# Altium PCB Narwhal_main_FIX.PcbDoc (part 2 of 2)
Units mm, origin at the board's own origin, x right, y up, seen from the top; angles counter-clockwise.
Board outline 83 x 16.93 mm, 4 copper layers (Top Layer, Layer 1, Layer 2, Bottom Layer), stack 1.58 mm thick; 96 components, 73 nets, 381 pads, 194 vias.
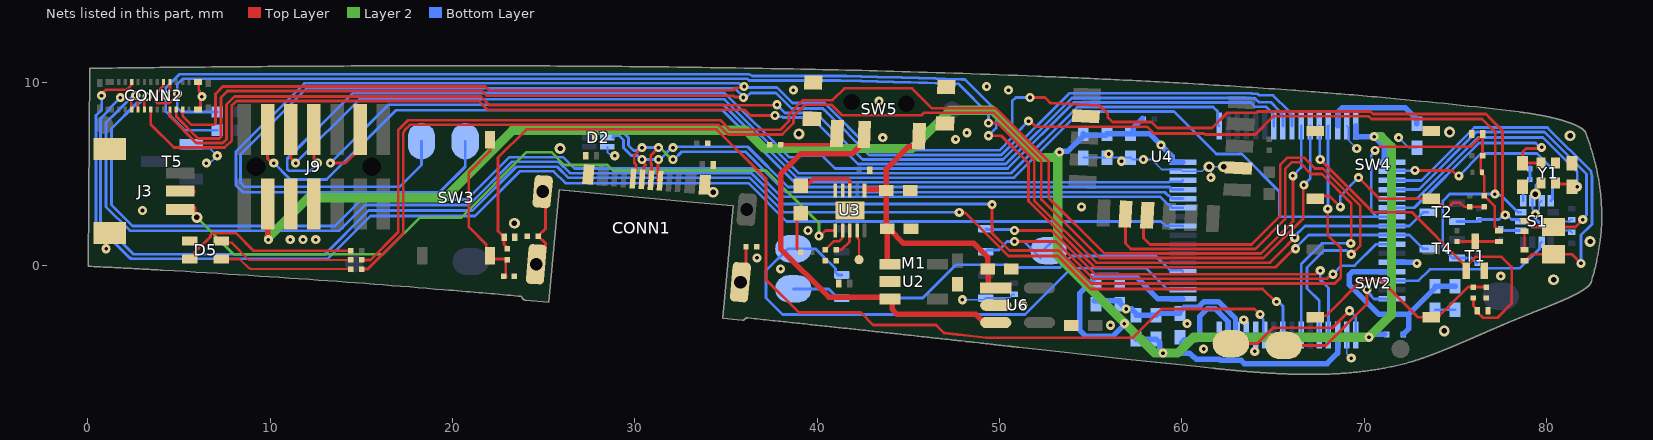
[diagram p4: the nets of this part, all layers, seen from the top]

## Via types
v1: diameter 0.5, hole 0.2, Top Layer to Bottom Layer, 125 vias
v2: diameter 0.5, hole 0.254, Top Layer to Bottom Layer, 42 vias
v3: diameter 0.6, hole 0.3, Top Layer to Bottom Layer, 27 vias

## Nets (pads, with @x,y where several pads share a name; then routed paths per layer and width w, separated by ;. In a path a pad name is that pad's centre, name@x,y a point inside that pad or via, vN(x,y) a via of type N, cw(c..) or ccw(c..) an arc to the next point about the centre after c; other vN are vias at no path point) (continued)
GND: C1.1 C2.1 C3.1 C4.1 C5.2 C6.1 C14.1 C15.1 C16.1 C17.1 C18.1 C19.1 C20.1 C21.1 C22.1 C23.1 C24.1 C26.1 C27.1 C28.1 C29.1 C30.1 C31.1 C32.1 C33.1 C34.1 C36.1 C37.1 C40.1 C41.1 CONN1.A1 CONN1.A12 CONN2.P1_1 CONN2.P1_2 D2.3 D5.1 J3.2 J3.MP1 J3.MP2 J9.5 J9.7 M1.4 R1.1 R2.1 R7.1 R14.1 R16.1 R17.1 R18.1 R19.1 R21.1 R26.1 S1.2 S1.3 S1.6 S1.7 SW4.1 SW4.2 SW5.MP1 SW5.MP2 SW5.MP3 SW5.MP4 T1.2 T5.1 U1.12 U1.18 U1.28 U1.29 U1.30 U1.32 U1.47 U1.63 U2.2 U3.4 U3.5 U3.11 U4.2 U4.13 U6.2 Y1.2 Y1.4 | length 46.8
  Top Layer w0.1: C5.2@45.1,4.1 C5.2@45.2,4.1 ; SW5.MP3@47.083,9.772 SW5.MP3@47.111,9.8 ; C31.1@78.8,0.85 C32.1@78.8,1.85
  Top Layer w0.15: CONN2.P1_2@6.09,10.042 6.09,9.611 6.118,9.582 6.118,9.473 6.251,9.34 v1(6.251,9.245) 6.185,9.179 6.185,8.68 CONN2.P1_1@6.138,8.633
  Top Layer w0.5: J3.2@4.561,4.046 J3.2@5.661,4.046
  Bottom Layer w0.1: T5.1@5.257,6.383 6.717,6.383 v1(7.1,6) 6.777,5.677 6.577,5.677 v1(6.5,5.6) ; D2.3@28.5,6.5 28.5,6.2 28.623,6.077 28.823,6.077 v1(28.9,6) ; v1(47.967,-1.899) 49.151,-1.899 M1.4@49.245,-1.805 50.535,-1.805 50.74,-1.6 C37.1@50.8,-1.6 ; C14.1@54.6,5.9 C22.1@55.9,5.9 56.7,5.9 C21.1@57.2,5.9 57.3,5.8 v1(57.9,5.8) 58.35,5.8 58.9,5.25 59.962,5.25 U1.47@60.062,5.15 61.115,5.15 61.365,5.4 v3(61.5,5.4) ; v1(61.6,4.8) 61.6,5.17 61.5,5.269 v3(61.5,5.4) ; v3(62.3,5.4) v3(61.5,5.4) ; U1.30@63.05,-3.838 U1.29@63.55,-3.838 U1.28@64.05,-3.838 ; U1.18@69.05,-3.838 69.05,-4.85 v1(69.3,-5.1) ; U1.63@69.05,7.638 69.15,7.538 69.15,6.85 v1(69.6,6.4) ; v1(71.9,7) 72.45,6.45 C15.1@72.9,6.45 ; v1@72.85,0.15 v1(72.9,0.1) ; R21.1@79.7,4.7 79.4,4.4 v3(79.4,3.9) 79.241,3.741 S1.2@79.241,3.53 79.241,3.063 79.4,2.903 v1@79.4,2.853 ; S1.3@79.741,3.53 79.613,3.402 79.613,3.066 v1@79.4,2.853 ; C1.1@81.4,1.8 81.3,1.9 S1.7@80.38,1.9 80.252,2.028 79.872,2.028 79.4,2.5 v1@79.4,2.583 ; C36.1@81.4,2.5 81.34,2.5 81.24,2.4 S1.6@80.38,2.4 79.583,2.4 v1@79.4,2.583 ; v1@79.4,2.583 v1(79.4,2.8) v1@79.4,2.853
  Bottom Layer w0.15: C17.1@73.9,-2.45 C18.1@75,-2.45
  Bottom Layer w0.3: C23.1@55.2,-1.95 56.6,-1.95 56.6,-2.05 v1(56.95,-2.4) 57.25,-2.4 57.5,-2.65 C19.1@57.5,-2.75 C20.1@58.6,-2.75 58.7,-2.65 C16.1@59.9,-2.65 59.9,-2.55 60.15,-2.3 60.934,-2.3 61.234,-2 62.019,-2 62.95,-2.931 62.95,-4.679 62.804,-4.826 62.296,-4.826 62.15,-4.679 62.15,-4.526 62.05,-4.426 U1.32@62.05,-3.838 ; U1.12@71.538,0.15 v1@72.85,0.15
  other v1: 64.008,-4.725 61.2,-4.6 56.096,-3.296 60.296,-3.204 63.4,-3 51.299,-2.199 77.5,-0.6 38,-0.2 36.7,0.4 1,0.9 11.1,1.4 11.8,1.4 12.5,1.4 39.5,1.9 3,3 54.5,3.2 56.7,5.7 56,6.1 47.6,6.9 43.6,7 48.213,7.266 43.4,9 38.7,9.6 50.5,9.6 49.3,9.8
  other v3: 74.4,-3.6 80.4,-0.8 82.4,1.3 23.4,2.3 34.3,4 25.9,6.4 81.3,7.1 39,7.2 74.7,7.3
I2C3_SCL_1V8: CONN2.3 J6.1 R3.1 S1.13 T2.2 | length 134.9
  Top Layer w0.15: CONN2.3@5.2,8.6 5.2,8.188 5.688,7.7 6.912,7.7 7,7.788 7,9.4 7.4,9.8 21.8,9.8 22,9.6 35.4,9.6 35.533,9.733 35.933,9.733 v1(36,9.8) ; v1(51.676,9.2) 52.492,9.2 52.751,8.941 52.792,8.9 52.849,8.897 55.481,8.759 55.522,8.718 55.949,8.292 55.949,8.101 56.2,7.85 58.35,7.85 58.68,7.52 61.656,7.52 62.499,8.362 64.108,8.362 64.17,8.425 70.36,8.425 70.493,8.292 76.683,8.292 76.971,8.003 77.6,7.374 77.6,2.994 77.749,2.844 v1(77.749,2.749)
  Bottom Layer w0.15: J6.1@20.7,6.8 20.7,5.4 19.3,4 8.5,4 8.125,4.375 8.125,6.225 11.875,9.975 35.73,9.975 35.905,9.8 v1(36,9.8) 36.05,9.75 37.804,9.75 38.655,8.9 40.4,8.9 43,6.3 50,6.3 50.7,7 50.7,9 50.9,9.2 v1(51.676,9.2) ; T2.2@75.1,2.4 76.2,2.4 R3.1@76.3,2.5 77.405,2.5 77.655,2.749 v1(77.749,2.749) 77.844,2.749 78.091,2.503 78.499,2.503 S1.13@78.602,2.4
I2C3_SCL_3V3: CONN2.10 R8.1 T2.3 U1.8 | length 81.9
  Top Layer w0.15: CONN2.10@4.151,10.042 4.136,10.027 4.136,9.827 3.731,9.421 3.731,9.297 3.732,9.296 3.732,8.973 3.82,8.885 4.454,8.885 4.703,9.134 4.703,9.144 4.91,9.352 v1(4.91,9.407) ; v1(49.4,7.8) 49.893,7.8 51.908,5.784 51.908,3.559 55.329,0.139 64.839,0.139 65.801,1.101 65.801,1.122 66.178,1.499 v1(66.201,1.499)
  Bottom Layer w0.15: v1@4.9,9.41 4.9,9.911 5.214,10.225 36.176,10.225 36.272,10.129 41.26,10.129 41.264,10.129 41.566,10.122 41.988,10.112 42.423,10.101 42.859,10.09 43.294,10.078 43.743,10.066 44.193,10.054 44.642,10.041 45.106,10.028 45.569,10.014 46.033,10 46.51,9.985 46.987,9.97 47.465,9.955 47.755,9.945 47.797,9.903 49.4,8.3 v1(49.4,7.8) ; v1(4.91,9.407) 4.9,9.397 4.9,8.634 5.134,8.4 R8.1@7.103,8.4 ; v1(66.201,1.499) 66.201,1.594 66.756,2.15 U1.8@71.538,2.15 72.501,2.15 T2.3@73.125,2.774 ; T2.3@73.125,2.775 73.25,2.9 T2.3@73.5,2.9
I2C3_SDA_1V8: CONN2.5 J8.1 R10.1 S1.14 T4.2 | length 135
  Top Layer w0.15: CONN2.5@4.851,8.542 4.85,8.54 4.85,8.15 6.05,6.95 7.212,6.95 7.3,7.038 7.3,9.2 7.65,9.55 21.615,9.55 21.865,9.3 35.408,9.3 35.483,9.225 35.934,9.225 v1(35.958,9.201) ; v1(51.6,7.9) 51.672,7.9 51.972,7.6 58.097,7.6 58.472,7.225 61.222,7.225 61.283,7.164 64.034,7.164 65.045,8.175 70.256,8.175 70.406,8.025 76.475,8.025 77.2,7.3 77.2,3.925 v1(77.175,3.9)
  Bottom Layer w0.15: J8.1@18.3,6.8 18.3,5.5 17.1,4.3 8.6,4.3 8.375,4.525 8.375,6.075 12,9.7 35.499,9.7 35.958,9.241 v1(35.958,9.201) ; v1@35.999,9.2 36.095,9.2 36.345,9.45 37.751,9.45 38.601,8.6 40.276,8.6 40.308,8.6 40.563,8.346 42.858,6.05 50.104,6.05 50.95,6.896 50.95,7.25 v1(51.6,7.9) ; R10.1@76.2,0.1 75.9,0.4 T4.2@75.1,0.4 74.85,0.4 74.325,0.925 74.325,3.522 74.703,3.9 v1(77.175,3.9) 77.2,3.9 77.267,3.833 77.529,3.833 78.462,2.9 S1.14@78.602,2.9
I2C3_SDA_3V3: CONN2.8 R9.1 T4.3 U1.9 | length 82.8
  Top Layer w0.15: v1(4.278,9.31) 4.278,9.351 4.5,9.573 CONN2.8@4.5,9.953 ; v1(49.4,7.1) 50.1,7.1 51.6,5.6 51.6,3.514 55.225,-0.111 65.143,-0.111 66.156,0.902 v1(66.25,0.902)
  Bottom Layer w0.15: v1@4.273,9.31 4.273,9.726 5.022,10.475 36.28,10.475 36.437,10.38 41.125,10.38 41.175,10.381 41.572,10.372 41.994,10.361 42.43,10.351 42.865,10.339 43.301,10.328 43.75,10.316 44.2,10.304 44.649,10.291 45.113,10.278 45.577,10.264 46.04,10.25 46.518,10.235 46.995,10.22 47.473,10.205 47.965,10.188 48.118,10.183 48.16,10.141 49.825,8.476 49.825,7.525 v1(49.4,7.1) ; v1(4.278,9.31) 4.278,8.422 5.3,7.4 R9.1@7.103,7.4 ; v1(66.25,0.902) 66.25,0.948 66.952,1.65 U1.9@71.538,1.65 72.501,1.65 73.125,1.025 73.25,0.9 T4.3@73.5,0.9
IMU_CS: R22.1 S1.12 | length 1.1
  Bottom Layer w0.15: R22.1@77.5,2 77.6,1.9 S1.12@78.602,1.9
IMU_IS_INT1: S1.4 U1.2 | length 11.6
  Top Layer w0.15: v1(72.8,5.2) 74.828,5.2 75.128,4.9 v1(75.2,4.9)
  Bottom Layer w0.15: U1.2@71.538,5.15 71.563,5.175 72.775,5.175 v1(72.8,5.2) ; v1(75.2,4.9) 76.425,6.125 79.488,6.125 80.344,5.269 80.344,3.633 S1.4@80.241,3.53
IMU_IS_INT2: S1.9 U1.14 | length 9.2
  Bottom Layer w0.15: U1.14@71.538,-0.85 72.988,-0.85 73.613,-0.225 76.422,-0.225 76.472,-0.175 78.539,-0.175 79.638,0.924 79.638,1.167 S1.9@79.741,1.27
IMU_SA0: R20.2 R21.2 S1.1 | length 2
  Bottom Layer w0.15: S1.1@78.741,3.53 78.741,4.341 R21.2@79.1,4.7 R20.2@79.1,5.4
MCU_3V3: C14.2 C19.2 C20.2 C21.2 C22.2 C23.2 C24.2 J9.3 L1.2 R23.1 U1.1 U1.19 U1.33 U1.48 U1.64 | length 126.5
  Top Layer w0.3: J9.3@9.86,3.365 9.88,3.345 9.88,1.42 v1(9.9,1.4)
  Layer 2 w0.5: v1(9.9,1.4) 9.9,1.5 12.1,3.7 19.6,3.7 23.3,7.4 36.1,7.4 37.1,6.4 45.2,6.4 47.3,8.5 49.6,8.5 52.2,5.9 53,5.9 ; v1(53.3,6.2) 53.2,6.1 53.2,0.501 56.855,-3.153 v1(56.855,-3.208) ; v1@56.882,-3.18 58.509,-4.808 58.674,-4.825 v1(58.976,-4.825) 59.775,-4.825 60.645,-3.955 v1(70.27,-3.955) 71.5,-2.725 71.5,6.5 70.95,7.05 v1(70.557,7.05)
  Bottom Layer w0.3: v1(53.3,6.2) 53.345,6.245 53.745,6.245 54.6,7.1 C14.2@54.6,7.2 ; C14.2@54.662,7.138 55.262,7.138 ; C23.2@55.2,-0.65 55.2,-0.75 54.4,-1.55 54.4,-3.546 54.754,-3.9 56.2,-3.9 56.855,-3.245 v1(56.855,-3.208) ; 55.338,7.138 55.838,7.138 C22.2@55.9,7.2 C21.2@57.2,7.2 ; C23.2@55.4,-0.55 56.5,-0.55 56.6,-0.65 57.512,-0.65 58.712,-1.85 U1.33@60.062,-1.85 ; v1@56.893,-3.207 57.35,-3.664 57.35,-3.9 C19.2@57.5,-4.05 C20.2@58.6,-4.05 58.8,-4.25 58.8,-4.65 v1(58.976,-4.825) 60.426,-4.825 60.79,-5.15 60.874,-5.15 62.055,-5.15 62.131,-5.226 63.266,-5.226 63.44,-5.4 67.976,-5.4 68.55,-4.825 U1.19@68.55,-3.838 ; R23.1@57.85,8.05 57.35,7.55 57.35,7.35 C21.2@57.2,7.2 ; U1.48@60.062,5.65 59.474,5.65 59.474,5.975 58.25,7.2 C21.2@57.2,7.2 ; U1.64@69.55,7.638 69.55,7.05 v1(70.557,7.05) 71.1,6.507 71.1,5.65 U1.1@71.538,5.65 ; v1@70.425,-3.8 L1.2@71.15,-3.8
  other v1: 58.862,6.588
MCU_BOOT: C26.2 R6.1 T1.1 U1.60 | length 20.3
  Top Layer w0.15: v1(67.6,5.8) 70.496,2.904 72.634,2.904 75.464,0.075 75.575,0.075 75.725,0.075 76.109,0.459 77.541,0.459 78.1,-0.1 78.1,-2.1 77.315,-2.885 76.525,-2.885 76.2,-2.56 C26.2@76.2,-2.5 76.2,-2.44 76,-2.24 R6.1@76,-1.8
  Bottom Layer w0.15: U1.60@67.55,7.638 67.575,7.613 67.575,5.825 v1(67.6,5.8)
MCU_BUTTON: C27.2 R12.1 U1.27 | length 57.6
  Top Layer w0.15: R12.1@23,0.9 22.925,0.975 22.925,1.05 22.829,1.146 22.829,1.599 22.754,1.674 22.694,1.674 22.5,1.868 22.5,5.899 24.051,7.45 34.494,7.45 37.2,4.744 37.2,-0.8 39,-2.6 42.4,-2.6 43.075,-3.275 46.533,-3.275 46.941,-3.683 46.978,-3.721 47.696,-3.8 48.346,-3.872 49.278,-3.975 57.325,-3.975 58.9,-2.4 63.999,-2.4 v1(64.299,-2.701)
  Bottom Layer w0.15: v1(64.299,-2.701) 64.299,-2.795 64.475,-2.971 64.475,-3.763 U1.27@64.55,-3.838
MCU_GREEN_LED: R36.2 U1.59 | length 70.3
  Top Layer w0.15: R36.2@15.026,-0.214 15.351,-0.214 17.3,1.735 17.3,7.201 17.3,7.251 17.381,7.409 17.408,7.447 17.661,7.7 34.597,7.7 35.122,7.175 38.083,7.175 38.711,7.803 38.711,8.172 39.339,8.8 40.8,8.8 41.377,8.223 45.723,8.223 45.821,8.321 45.865,8.365 49.681,8.365 52.3,5.746 52.3,3.6 55.511,0.389 64.489,0.389 66.667,2.567 66.667,4.367 v1(66.7,4.4)
  Bottom Layer w0.15: v1(66.7,4.4) 67.05,4.75 67.05,6.147 U1.59@67.05,7.638
MCU_I/O_1: CONN2.7 U1.57 | length 68.8
  Top Layer w0.15: CONN2.7@4.5,8.6 4.5,8.146 5.946,6.7 6.2,6.7 7.4,6.7 7.6,6.9 7.6,8.811 8.044,9.255 21.556,9.255 22.036,8.775 37.775,8.775 v1(37.8,8.8)
  Bottom Layer w0.15: v1(37.8,8.8) 38.25,8.35 39.95,8.35 42.5,5.8 50.207,5.8 53.832,9.425 63.812,9.425 63.84,9.423 64.096,9.406 64.152,9.402 64.192,9.363 64.239,9.315 65.008,9.315 65.875,8.448 65.875,8.388 65.963,8.3 65.975,8.3 66.05,8.226 U1.57@66.05,7.638
MCU_I/O_2: CONN2.13 U1.56 | length 69.6
  Top Layer w0.15: CONN2.13@3.45,8.542 3.45,7.718 4.718,6.45 7.504,6.45 7.898,6.844 7.898,8.756 8.148,9.005 21.453,9.005 21.933,8.525 36.021,8.525 36.337,8.21 v1(37.693,8.21)
  Bottom Layer w0.15: v1(37.693,8.21) 37.76,8.143 38.104,8.143 38.146,8.1 39.7,8.1 42.25,5.55 50.35,5.55 53.975,9.175 63.804,9.175 63.963,9.164 64.019,9.161 64.059,9.121 64.244,8.936 64.887,8.936 65.375,8.448 65.375,8.401 65.55,8.226 U1.56@65.55,7.638
MCU_I/O_3: CONN2.15 U1.43 | length 69.5
  Top Layer w0.15: CONN2.15@3.1,8.681 3.1,8.998 3.258,9.156 v1(3.258,9.251)
  Bottom Layer w0.15: v1(3.258,9.251) 3.173,9.251 2.803,8.881 2.681,8.881 1.3,7.5 1.3,3.3 2.455,2.145 13.545,2.145 15,3.6 20.8,3.6 23.125,5.925 26.074,5.925 26.699,5.3 36.5,5.3 38.05,3.75 58.827,3.75 59.252,3.325 59.312,3.325 59.4,3.237 59.4,3.225 59.474,3.15 U1.43@60.062,3.15
MCU_I/O_4: CONN2.20 U1.41 | length 72.9
  Top Layer w0.15: v1(0.751,9.304) 0.751,9.386 0.983,9.619 2.126,9.619 2.384,9.876 2.384,9.88 2.386,9.883 2.386,10.027 CONN2.20@2.401,10.042
  Bottom Layer w0.15: v1(0.751,9.304) 0.767,9.287 0.767,8.545 0.442,8.219 0.442,2.258 2.3,0.4 2.346,0.4 2.396,0.35 13.15,0.35 15.5,2.7 21.241,2.7 23.691,5.15 25.55,5.15 26.2,4.5 36.232,4.5 38.332,2.4 40.859,2.4 40.872,2.413 41.043,2.413 41.056,2.4 58.866,2.4 59.1,2.166 60.046,2.166 U1.41@60.062,2.15
MCU_LPUART1_RX: J1.1 U1.17 | length 8.9
  Top Layer w0.15: J1.1@62.75,-4.25 J1.1@62.7,-4.3 64.142,-4.3 65.008,-3.433 68.267,-3.433 v1(69.2,-2.5) v1@69.25,-2.55
  Bottom Layer w0.15: v1(69.2,-2.5) 69.55,-2.85 U1.17@69.55,-3.838
MCU_LPUART1_TX: J2.1 U1.16 | length 8
  Top Layer w0.15: J2.1@65.6,-4.4 67.901,-4.4 70.165,-2.136 v1(70.165,-1.335)
  Bottom Layer w0.15: v1(70.165,-1.335) 70.165,-1.43 70.383,-1.648 70.383,-1.683 70.55,-1.85 U1.16@71.538,-1.85
MCU_NRST: C25.2 C28.2 D1.2 J9.12 R5.1 R13.1 U1.7 | length 84.8
  Top Layer w0.15: v1(13.3,5.6) 14.13,5.6 14.94,6.41 J9.12@14.94,7.435 ; v1(70.6,6.3) 70.663,6.3 70.863,6.5 75.86,6.5 C28.2@76.5,7.14 ; R5.1@76.4,6 76.4,5.065 76.6,4.865 R13.1@76.6,3.8 77.175,3.225 77.175,2.125 77.265,2.035 77.265,1.975 77.34,1.9 C25.2@77.4,1.9 ; R5.1@76.5,6 C28.2@76.5,7.14 ; C28.2@76.5,7.2 C28.2@76.5,7.14
  Bottom Layer w0.15: v1(13.3,5.6) 16.5,8.8 34.867,8.8 38.867,4.8 50.8,4.8 54.425,8.425 59.575,8.425 61.9,6.1 63.3,6.1 65.35,4.05 65.35,2.65 70.703,2.65 ; v1(70.6,6.3) 70.6,6.237 70.4,6.037 70.4,2.953 70.703,2.65 ; U1.7@71.538,2.65 70.703,2.65
MCU_OSC32_IN: C31.2 U1.3 X1.2 | length 21.9
  Top Layer w0.15: C31.2@78.8,0.25 78.86,0.25 79.21,0.6 X1.2@80.4,0.6 81.4,0.6 v1(81.9,0.1)
  Bottom Layer w0.15: U1.3@71.538,4.65 73.151,4.65 76.051,7.55 80.05,7.55 80.1,7.5 82.444,5.156 82.448,5.136 82.464,5.06 82.48,4.985 82.495,4.91 82.5,4.884 82.5,2.247 81.9,1.647 v1(81.9,0.1)
MCU_OSC32_OUT: C32.2 U1.4 X1.1 | length 19.1
  Top Layer w0.15: C32.2@78.74,2.45 C32.2@78.8,2.45 78.86,2.45 79.21,2.1 X1.1@80.4,2.1 81.6,2.1 v1(82,2.5)
  Bottom Layer w0.15: U1.4@71.538,4.15 73.005,4.15 76.155,7.3 79.9,7.3 82.2,5 82.2,2.763 82,2.563 v1(82,2.5)
MCU_OSC_IN: C29.2 U1.5 Y1.1 | length 14.4
  Top Layer w0.15: Y1.1@80.5,4.5 80.55,4.45 81.25,4.45 C29.2@81.4,4.3 v1(81.7,4.3)
  Bottom Layer w0.15: U1.5@71.538,3.65 72.896,3.65 76.246,7 79.809,7 81.7,5.109 v1(81.7,4.3)
MCU_OSC_OUT: C30.2 U1.6 Y1.3 | length 12.5
  Top Layer w0.15: Y1.3@79.7,5.6 C30.2@78.7,5.6 78.7,6.2 78.9,6.4 79.676,6.4 v1(79.742,6.466)
  Bottom Layer w0.15: U1.6@71.538,3.15 72.756,3.15 76.306,6.7 79.413,6.7 79.647,6.466 v1(79.742,6.466)
MCU_RED_LED: R37.2 U1.58 | length 70
  Top Layer w0.15: R37.2@15.026,0.286 15.497,0.286 17.027,1.816 17.027,7.419 17.558,7.95 34.701,7.95 35.226,7.425 37.98,7.425 38.461,7.906 38.461,8.276 39.235,9.05 40.85,9.05 41.5,9.7 45.2,9.7 46.285,8.615 49.785,8.615 52.7,5.7 52.7,3.7 55.761,0.639 64.339,0.639 66.1,2.4 v1(66.1,4.9)
  Bottom Layer w0.15: v1(66.1,4.9) 66.55,5.35 U1.58@66.55,7.638
MCU_SWCLK: J9.6 U1.49 | length 58.1
  Top Layer w0.15: J9.6@11.13,7.435 11.13,5.87 v1(11.4,5.6)
  Bottom Layer w0.15: v1(11.4,5.6) 14.9,9.1 34.92,9.1 38.97,5.05 50.65,5.05 54.275,8.675 61.725,8.675 61.975,8.425 61.975,7.713 U1.49@62.05,7.638
MCU_SWDIO: J9.4 U1.46 | length 55.5
  Top Layer w0.15: J9.4@9.86,7.435 9.86,5.84 10.033,5.667 10.133,5.667 v1(10.2,5.6)
  Bottom Layer w0.15: v1(10.2,5.6) 11.1,4.7 13.1,4.7 16.9,8.5 34.813,8.5 38.763,4.55 59.312,4.55 59.337,4.575 59.987,4.575 U1.46@60.062,4.65
MCU_SWO: J9.8 U1.55 | length 64.2
  Top Layer w0.15: J9.8@12.4,7.435 12.4,5.8 v1(12.6,5.6)
  Bottom Layer w0.15: v1(12.6,5.6) 12.175,5.175 11.025,5.175 10.937,5.263 10.937,5.837 14.55,9.45 34.924,9.45 38.449,5.925 39.028,5.925 39.103,6 40.287,6 40.987,5.3 50.454,5.3 54.079,8.925 63.791,8.925 64.03,8.686 64.637,8.686 64.875,8.448 64.875,8.4 65.05,8.226 U1.55@65.05,7.638
MCU_USART3_RX: U1.21 U4.8 | length 27.8
  Top Layer w0.15: U4.8@58.113,2.739 57.9,2.526 57.9,1.5 58.261,1.139 63.839,1.139 65.4,2.7 65.4,5.5 65.8,5.9 66.7,5.9 67.3,5.3 67.746,5.3 69.8,3.246 69.8,1.078 69.322,0.6 v1(69.3,0.6)
  Bottom Layer w0.15: U1.21@67.55,-3.838 67.55,-1.95 66.875,-1.275 66.875,-0.125 67.8,0.8 69.037,0.8 69.237,0.6 v1(69.3,0.6)
MCU_USART3_TX: U1.23 U4.7 | length 27.9
  Top Layer w0.15: U4.7@56.915,2.802 56.915,1.185 57.211,0.889 64.039,0.889 65.675,2.525 65.675,5.275 66.05,5.65 66.45,5.65 67.1,5 67.693,5 69.3,3.393 69.3,1.225 v1(69.275,1.2)
  Bottom Layer w0.15: U1.23@66.55,-3.838 66.55,0.05 67.7,1.2 v1(69.275,1.2)
MCU_VDD11_1: C16.2 U1.31 | length 5
  Bottom Layer w0.3: C16.2@60,-4.25 60.15,-4.1 60.824,-4.1 61,-3.924 61,-2.8 61.4,-2.4 61.853,-2.4 62.55,-3.097 U1.31@62.55,-3.838
MCU_VDD11_2: C15.2 U1.62 | length 5.7
  Bottom Layer w0.3: U1.62@68.55,7.638 68.55,8.379 68.796,8.625 72.275,8.625 72.9,8 C15.2@72.9,7.75
MCU_VDDA: C17.2 C18.2 L1.1 U1.13 | length 11.4
  Bottom Layer w0.3: U1.13@71.538,-0.35 69.376,-0.35 69.2,-0.526 69.2,-1.078 70.822,-2.7 72.45,-2.7 ; L1.1@72.145,-3.8 72.45,-3.495 72.45,-2.7 ; C18.2@75,-1.15 C17.2@73.9,-1.15 73.9,-1.25 72.45,-2.7
MDF1_CCK0: CONN2.17 U1.61 | length 90
  Top Layer w0.15: v1(2.627,9.306) 2.627,9.212 2.742,9.097 CONN2.17@2.742,8.485 ; v1(49.6,3.325) 49.6,1.754 50.554,0.8 53.254,0.8 55.054,-1 68.4,-1 68.475,-0.925 ; v1(68.008,3.089) 68.008,1.666 68.725,0.949 68.725,-0.676 68.476,-0.925
  Bottom Layer w0.15: v1(2.627,9.306) 2.533,9.306 2.412,9.186 2.376,9.186 1.609,8.418 1.599,8.418 1,7.819 1,3.2 2.305,1.895 13.795,1.895 15.2,3.3 20.9,3.3 23.275,5.675 25.825,5.675 26.45,5.05 36.389,5.05 38.082,3.356 49.569,3.356 v1(49.6,3.325) ; v1(68.008,3.089) 68.029,3.11 68.029,7.617 U1.61@68.05,7.638
MDF1_SDIO: CONN2.19 U1.25 | length 80.7
  Top Layer w0.15: v1(1.783,9.194) 1.792,9.186 2.147,9.186 2.385,8.948 2.385,8.702 2.386,8.701 CONN2.19@2.386,8.468 ; v1(47.8,2.9) 47.836,2.864 48.136,2.864 50.5,0.5 53.2,0.5 55,-1.3 64.443,-1.3 65.143,-2 v1(65.2,-2)
  Bottom Layer w0.15: v1(1.783,9.194) 1.217,8.627 1.217,8.57 0.7,8.054 0.7,2.4 2.5,0.6 13,0.6 15.4,3 21.1,3 23.5,5.4 25.746,5.4 26.346,4.8 36.285,4.8 38.185,2.9 v1(47.8,2.9) ; v1@65.25,-1.95 65.55,-2.25 U1.25@65.55,-3.838
NetC25_1: C25.1 R4.1 T1.3 | length 2.3
  Top Layer w0.15: R4.1@75.1,1.3 T1.3@76.1,1.3 C25.1@77.4,1.3
NetCONN1_MH1: CONN1.MH1 CONN1.MH2 R18.2 | length 4.6
  Top Layer w0.156: CONN1.MH2@24.601,-0.256 24.601,0.426 25.1,0.925 25.1,1.2 R18.2@24.7,1.6 25.1,2 25.1,3.579 CONN1.MH1@24.95,3.729
NetCONN1_MH3: CONN1.MH3 R19.2 | length 2.4
  Top Layer w0.156: CONN1.MH3@35.798,-1.235 36.077,-0.957 36.077,0.006 36.1,0.029 R19.2@36.1,1
NetD3_1: D3.1 U3.3 | length 3.5
  Top Layer w0.2: D3.1@39.1,4.05 39.775,4.725 41.691,4.725 41.809,4.608 41.809,4.442 41.8,4.434 U3.3@41.8,4.1
NetD3_2: D3.2 R25.2 | length 2.3
  Top Layer w0.15: R25.2@39.1,0.7 38.9,0.9 38.9,2.65 D3.2@39.1,2.85
NetD5_2: D5.2 R37.1 | length 7.5
  Top Layer w0.127: D5.2@7.331,1.331 7.42,1.242 7.872,1.242 8.827,0.286 R37.1@14.426,0.286
NetD5_3: D5.3 R36.1 | length 7.3
  Top Layer w0.127: D5.3@7.331,0.331 8.337,0.331 8.834,-0.166 8.888,-0.166 8.936,-0.214 R36.1@14.426,-0.214
NetD5_4: D5.4 R35.1 | length 10
  Top Layer w0.15: D5.4@5.581,0.331 5.674,0.331 5.849,0.506 5.849,0.719 6.037,0.906 6.078,0.906 6.731,1.559 6.731,1.654 6.833,1.756 8.131,1.756 9.101,0.786 R35.1@14.426,0.786
NetR1_2: R1.2 U3.7 | length 1.6
  Top Layer w0.15: R1.2@40.45,0.85 40.908,1.308 41.208,1.308 41.375,1.475 41.375,1.875 U3.7@41.4,1.9
NetR2_2: R2.2 U3.8 | length 1.5
  Top Layer w0.15: R2.2@41.05,0.85 41.35,0.85 41.775,1.275 41.775,1.875 U3.8@41.8,1.9
NetR6_2: R6.2 R7.2 SW2.1 SW2.2 | length 11.7
  Top Layer w0.15: SW2.2@67.319,-2.854 67.405,-2.768 67.932,-2.768 69.9,-0.8 70.9,-0.8 72.954,-2.854 SW2.1@73.681,-2.854 73.886,-2.65 74.25,-2.65 75.7,-1.2 R6.2@76,-1.2 R7.2@76.65,-1.2
NetR11_1: R11.1 R13.2 SW4.3 SW4.4 | length 11.4
  Top Layer w0.15: SW4.3@67.319,3.646 67.473,3.8 68.1,3.8 68.7,3.2 v1(68.701,3.2) ; v1(69.7,4.8) 70.854,3.646 73.878,3.646 74.295,3.229 74.688,3.229 74.883,3.425 75.276,3.425 75.501,3.2 R11.1@75.8,3.2 R13.2@76.6,3.2
  Bottom Layer w0.15: v1(68.701,3.2) 68.7,3.201 68.7,3.8 v1(69.7,4.8)
NetR12_2: R12.2 R14.2 SW3.3 SW3.4 | length 9.3
  Top Layer w0.15: SW3.3@22.054,0.5 21.85,0.704 21.85,1.15 20.9,2.1 20.9,5.1 22.054,6.254 SW3.4@22.054,6.881 ; SW3.3@22.054,0.519 22.234,0.339 22.918,0.339 22.928,0.329 22.928,-0.59 22.938,-0.6 R14.2@22.938,-0.665
NetR26_2: R26.2 SW5.3 | length 3.5
  Top Layer w0.2: R26.2@38.024,6.6 40.814,6.6 41.09,6.876 SW5.3@41.09,7.23
NTC: J3.3 U3.6 | length 41.8
  Top Layer w0.15: J3.3@5.073,3.064 5.349,3.064 J3.3@5.441,3.156 ; J3.3@5.773,3.269 5.897,3.145 5.897,2.703 v3(5.98,2.62) ; v1(40.1,1.6) 40.172,1.6 40.472,1.9 U3.6@41,1.9
  Layer 2 w0.15: v3(5.98,2.62) 8,0.6 16.2,0.6 18.2,2.6 20.472,2.6 24.072,6.2 25.428,6.2 26.128,5.5 28.5,5.5 28.8,5.2 37.2,5.2 40.1,2.3 v1(40.1,1.6)
SPI2_CS_NAND: M1.1 U1.20 | length 23.2
  Top Layer w0.15: v1(50.825,1.9) 52.861,1.9 55.261,-0.5 67.337,-0.5 67.537,-0.3 v1(67.6,-0.3)
  Bottom Layer w0.15: M1.1@49.245,2.005 49.298,1.953 50.772,1.953 v1(50.825,1.9) ; v1(67.6,-0.3) 67.6,-0.8 68.05,-1.25 U1.20@68.05,-3.838
SPI2_MISO: J7.1 M1.2 U1.10 | length 26.6
  Top Layer w0.15: v1(50.826,1.3) 53.107,1.3 55.157,-0.75 67.955,-0.75 68.205,-0.5 v1(68.3,-0.5)
  Bottom Layer w0.15: M1.2@49.245,0.735 49.349,0.839 49.965,0.839 50.426,1.3 50.776,1.3 v1@50.788,1.312 ; v1@50.8,1.3 51.35,1.3 52.225,0.425 J7.1@52.25,0.4 ; J7.1@52.425,0.825 J7.1@52.9,1.3 ; v1(68.3,-0.5) 68.775,-0.025 69.476,-0.025 70.651,1.15 U1.10@71.538,1.15
SPI2_MOSI: J4.1 M1.5 U1.36 | length 23
  Bottom Layer w0.15: J4.1@38.7,-1.3 40.64,-1.3 41.145,-1.805 M1.5@41.355,-1.805 45.795,-1.805 47.625,0.025 50.404,0.025 50.554,-0.125 53.333,-0.125 53.958,0.5 58.577,0.5 59.352,-0.275 59.987,-0.275 U1.36@60.062,-0.35
SPI2_SCK: J5.1 M1.6 U1.34 | length 31.6
  Bottom Layer w0.15: M1.6@41.355,-0.535 41.145,-0.535 41.01,-0.4 41.01,-0.19 39.92,0.9 J5.1@38.7,0.9 38.4,0.9 37.2,-0.3 37.2,-1.8 38.1,-2.7 51.4,-2.7 53.925,-0.175 58.075,-0.175 59.203,-1.303 60.015,-1.303 U1.34@60.062,-1.35
STAT1: J12.1 U3.9 | length 1.6
  Top Layer w0.127: U3.9@42.2,1.9 42.236,1.863 42.236,1.463 42.3,1.4 J12.1@42.3,0.3
SWITCH_ON: SW5.2 U2.3 U6.3 | length 23.2
  Top Layer w0.3: SW5.2@42.589,7.177 42.589,6.791 41.904,6.106 39.103,6.106 38,5.003 38,0.9 40.65,-1.75 43.475,-1.75 U2.3@43.65,-1.925 ; U2.3@44,-1.85 44.124,-1.974 44.124,-2.424 44.395,-2.695 48.714,-2.695 49.168,-3.15 U6.3@49.799,-3.15
SYS: C2.2 C5.1 C40.2 SW5.1 U2.1 U3.1 U6.1 | length 16.9
  Top Layer w0.3: U3.1@42.6,4.1 42.6,4.126 42.65,4.176 C5.1@43.6,4.176 ; C2.2@43.8,2 C5.1@43.8,4.1 43.8,5.285 45.013,6.498 45.362,6.498 45.588,6.724 SW5.1@45.588,7.073 ; 43.85,0.377 C2.2@43.85,2 43.95,2 44.75,1.2 48.6,1.2 49.35,0.45 C40.2@49.35,-0.2 49.4,-0.25 49.4,-1.092 49.558,-1.25 U6.1@49.799,-1.25
USB_OTG_N: CONN1.A7 CONN1.B7 D2.1 U1.44 | length 38.2
  Top Layer w0.156: CONN1.B7@29.936,4.485 29.936,5.158 30.063,5.285 30.063,5.532 29.972,5.623 29.972,6.022 v1(30.4,6.45) ; CONN1.A7@30.854,4.407 30.828,4.432 30.828,5.152 30.917,5.241 30.917,5.578 30.872,5.623 30.872,6.022 v1(31.3,6.45)
  Layer 2 w0.156: v1(31.3,6.45) 31.375,6.45 32.025,5.8 v1(32.1,5.8)
  Bottom Layer w0.156: D2.1@28.8,7.45 28.822,7.428 28.876,7.428 28.913,7.391 29.25,7.391 29.653,6.988 29.653,6.563 29.925,6.291 30.147,6.291 30.307,6.45 v1(30.4,6.45) ; v1@30.346,6.5 30.396,6.45 v1(31.3,6.45) ; v1(32.1,5.8) 32.154,5.8 32.573,6.219 36.081,6.219 38.297,4.003 59.07,4.003 59.251,3.822 59.302,3.822 59.474,3.65 U1.44@60.062,3.65
USB_OTG_P: CONN1.A6 CONN1.B6 D2.2 U1.45 | length 36.5
  Top Layer w0.156: CONN1.A6@30.4,4.407 30.4,5.084 30.511,5.196 30.511,5.409 30.599,5.497 30.599,5.498 30.507,5.591 30.507,5.693 v1(30.4,5.8) ; v1(31.3,5.8) 31.272,5.772 31.272,4.651 31.396,4.528 CONN1.B6@31.396,4.319
  Bottom Layer w0.156: D2.2@28.8,6.988 28.8,7.05 28.822,7.072 28.876,7.072 28.913,7.11 29.134,7.11 29.372,6.872 29.372,6.446 29.809,6.01 30.137,6.01 30.346,5.8 31.375,5.8 32.025,6.45 v1(32.1,6.45) ; v1@32.05,6.5 36.197,6.5 38.413,4.284 59.34,4.284 59.474,4.15 U1.45@60.062,4.15
pads on no net: CONN1.A8 CONN1.B8 CONN1.MH4 CONN2.2 CONN2.4 CONN2.6 CONN2.11 CONN2.12 CONN2.14 CONN2.16 CONN2.18 CONN2.21 CONN2.22 CONN2.23 CONN2.24 CONN2.P1_3 CONN2.P1_4 CONN2.P2_1 CONN2.P2_2 CONN2.P2_3 CONN2.P2_4 D2.5 D2.6 J9.1 J9.2 J9.9 J9.10 J9.11 J9.13 J9.14 J9.15 J9.16 S1.10 S1.11 SW5.MH1 SW5.MH2 U1.11 U1.15 U1.22 U1.24 U1.26 U1.35 U1.51 U1.52 U1.53 U1.54 U2.4 U4.1 U4.3 U4.4 U4.5 U4.15 U6.4
copper on no net:
  other v2: 66.977,-6.308 65.764,-6.27 68.19,-6.278 64.552,-6.215 42.129,-3.882 40.981,-3.751 39.787,-3.623 38.612,-3.488 37.431,-3.38 20.656,-1.755 19.409,-1.631 18.162,-1.568 16.916,-1.444 15.669,-1.387 83.149,0.253 -0.274,0.4 83.282,1.345 -0.274,1.428 -0.274,2.457 83.398,2.438 -0.274,3.486 83.446,3.531 -0.274,4.515 83.337,4.623 -0.274,5.543 -0.274,6.572 -0.274,7.601 -0.274,8.629 74.275,9.239 73.084,9.346 71.894,9.448 70.703,9.565 -0.274,9.658 69.513,9.691 -0.274,10.687 29.768,11.209 30.711,11.209 31.654,11.209 32.596,11.209 33.539,11.209 34.482,11.209 35.425,11.209

## Polygon pours and split planes (outlines as drawn)
GND on Top Layer "NONET_L-01_P-001" (solid, pour order 41): 0.304,6.805 7.978,6.755 8.017,0.413 5.365,0.4 4.2,0.4 0.818,0.4 0.304,0.914
GND on Top Layer "NONET_L-01_P-001" (solid, pour order 71): 37.724,10.408 55.705,10.408 56.56,9.553 56.56,-4.618 54.811,-6.368 50.303,-4.795 42.1,-3.5 42,-3.6 41.8,-3.4 36.5,-3.4 36.5,-2.9 35.1,-1.5 35.2,-1.4 35.2,7.885
BATT on Top Layer "NONET_L-01_P-001" (solid, pour order 23): 38.644,6 40.685,6 40.83,6 40.83,4.973 38.644,4.973
GND on Top Layer "NONET_L-01_P-001" (solid, pour order 25): 25.6,6.7 26.2,7.3 34.367,7.3 35.743,5.925 35.37,3.738 25.6,4.511
3V3 on Top Layer "NONET_L-01_P-001" (solid, pour order 63): 44.627,0.75 44.627,-0.576 47.72,-0.613 47.72,-0.795 48.612,-0.804 48.612,-0.625 48.612,0.712
BATT_POS on Top Layer "NONET_L-01_P-001" (solid, pour order 14): 2.144,6.877 3.778,6.877 3.778,4 3.678,3.9 2.328,3.9 2.144,4.084
GND on Top Layer "NONET_L-01_P-001" (solid, pour order 45): 78.1,3.301 82.296,3.301 82.3,3.304 82.5,3.104 82.5,-0.5 81.8,-1.2 81.8,-1.3 79.4,-1.3 79.2,-1.5 78.1,-0.4
1V8 on Top Layer "NONET_L-01_P-001" (solid, pour order 69): 51.231,-0.815 51.231,-1.377 51.208,-1.4 51.508,-1.7 52.5,-1.7 54.5,-3.7 56.6,-3.7 56.6,-1.793 56.508,-1.701 54.949,-1.701 54.063,-0.815
GND on Top Layer "NONET_L-01_P-001" (solid, pour order 44): 78.1,7.399 78.1,3.301 78.201,3.2 82.196,3.2 82.3,3.304 82.3,6.504 81.405,7.399
GND on Top Layer "tga" (solid, pour order 46): 75.867,0.455 78.3,0.981 78.3,-0.1 82,-1.4 77.077,-3.92 76.4,-3.6
3V3 on Top Layer "NONET_L-01_P-001" (solid, pour order 75): 74.219,0.254 74.219,1.054 73.973,1.3 72.219,1.3 72.219,0.254
GND on Top Layer "NONET_L-01_P-001" (solid, pour order 43): 76.1,7.6 76.1,6.9 76.18,6.82 76.16,6.8 66.799,6.502 66.797,7.798 75.7,7.9 76,7.6
3V3 on Top Layer "NONET_L-01_P-001" (solid, remove dead copper, pour order 74): 17.8,7.5 19.961,7.5 20.076,7.385 20.099,-0.204 19.3,-0.2 17.5,-0.2 17.5,0.4 17.5,7.2
GND on Top Layer "NONET_L-01_P-001" (solid, pour order 24): 24.2,2.2 24.6,1.8 24.6,1 24.4,0.8 24.4,-1.6 23.2,-1.6 22.757,-1.157 22.757,1.757 23.2,2.2
3V3 on Top Layer "NONET_L-01_P-001" (solid, pour order 72): 66.385,1.4 66.385,-0.1 68.5,-0.1 68.5,1.4
MCU_3V3 on Top Layer "NONET_L-01_P-001" (solid, pour order 49): 9.5,4.8 10.2,4.8 10.2,1.2 10,1 9.8,1 9.5,1.3 9.5,1.4
GND on Top Layer "NONET_L-01_P-001" (solid, pour order 42): 59.9,5.9 60,5.8 63.9,5.8 63.9,4.8 60,4.8 60,4.9 60,5.205 59.9,5.4
GND on Top Layer "NONET_L-01_P-001" (solid, pour order 38): 10.7,4.8 13,4.8 13,1.3 12.9,1.2 12.7,1 11,1 10.775,1.39 10.7,1.7
3V3 on Layer 1 "NONET_L-01_P-001" (solid, pour order 36): 0.2,10.8 0.1,10.7 0.1,8.4 3.765,8.4 4.633,7.533 4.568,7.468 4.568,1.697 8.816,1.697 10.492,0.199 19.503,-0.082 23.412,4.3 23.999,5.205 37.895,5.205 38.8,4.3 38.8,1.9 42.1,-1.4 57.7,-1.4 59.4,-3.1 73.4,-3.1 73.4,-0.6 75.697,1.697 75.697,3.597 79.998,7.898 79.998,8.302 76.9,11.4 0.2,11.4 0.2,10.8 0.1,10.7
1V8 on Layer 1 "NONET_L-01_P-001" (solid, pour order 35): 38.752,3.65 38.752,1.843 41.997,-1.402 57.004,-1.402 58.704,-3.102 72.704,-3.102 72.704,-0.302 73.986,0.98 74.271,3.259 79.41,8.398 80.686,8.398 83.058,5.813 83.058,-0.3 74.204,-6.202 55.704,-6.202 54.704,-5.202 36.604,-5.202 34.104,-2.702 34.304,-2.502 34.304,3.198 25.904,3.198 25.104,3.998 24.704,3.598 24.704,-2.002 0.904,-2.002 -0.596,-0.502 -0.596,8.398 4.734,8.398 4.734,1.6 8.688,1.6 9.506,0.869 19.68,0.685 23.801,5.896 37.304,5.098
5V_USB on Layer 1 "NONET_L-01_P-001" (solid, pour order 34): 34.7,6.4 34.074,7.026 38.974,7.026 39.4,6.6 39.3,6.5 39.907,6.093 40.186,5.7 41.559,4.328 44.7,4.328 46.267,3.5 63.502,3.5 63.502,0.87 42.296,0.87 37.313,5.178 34.432,5.032
BATT on Layer 1 "NONET_L-01_P-001" (solid, pour order 31): 40.819,6.727 40.819,5.051 38.454,5.051 38.454,5.654 39.527,6.727
5V_USB on Layer 1 "NONET_L-01_P-001" (solid, pour order 32): 34.42,7.026 34.7,6.745 34.7,5.196 34.533,5.029 26.983,5.267 25.9,5.9 26.081,7.026
BATT on Layer 1 "NONET_L-01_P-001" (solid, pour order 22): 5.695,4.573 5.695,3.1 7.9,3.079 7.9,4.573
BATT_POS on Layer 1 "NONET_L-01_P-001" (solid, pour order 15): 2.2,7.5 3.7,7.5 4,7.2 4,4 3.7,3.7 2.1,3.7 1.8,4 1.8,7.1
3V3 on Bottom Layer "NONET_L-01_P-001" (solid, pour order 30): 5.1,10 8.2,10 8.9,9.3 8.9,7.3 8.5,6.9 7.8,6.9 7.8,7.3 7.6,7.5 7.6,8.6 5.5,8.6 5.1,9
5V_USB on Bottom Layer "NONET_L-01_P-001" (solid, pour order 67): 26.1,6.8 27.9,6.8 28,6.7 28,5.478 26.722,5.478 26.1,6.1
MCU_VDDA on Bottom Layer "NONET_L-01_P-001" (solid, pour order 52): 71.8,-4.5 72.1,-4.8 72.7,-4.8 73,-4.5 73,-2.6 72.9,-2.5 72.9,-2 72.6,-2 72.2,-2.4 71.899,-2.5
MCU_3V3 on Bottom Layer "NONET_L-01_P-001" (solid, pour order 51): 69.9,-3 71.4,-3 71.6,-3.2 71.6,-4.6 71.3,-4.9 70.1,-4.9 69.9,-4.7
BATT_POS on Bottom Layer "NONET_L-01_P-001" (solid, pour order 17): 2.1,7.1 2.127,7.127 4.173,7.127 4.173,4.238 3.835,3.9 2.4,3.9 2.1,4.2
MCU_3V3 on Bottom Layer "NONET_L-01_P-001" (solid, pour order 61): 61.1,-2 60.701,-1.601 59.101,-1.601 57.912,-0.412 54.188,-0.412 54,-0.6 54,-3.7 55,-4.7 58.2,-4.7 58.8,-5.3 59.9,-5.3 59.9,-3.2
GND on Bottom Layer "NONET_L-01_P-001" (solid, pour order 64): 79.3,5 80,5 80,4.9 80.3,4.6 80,4.3 80,3.499 80.549,2.95 81.813,2.95 82.2,2.563 82.2,1.947 82.147,1.947 81.7,1.5 81.6,1.6 79.5,1.6 79,2.1 79,4.7
MCU_3V3 on Bottom Layer "NONET_L-01_P-001" (solid, pour order 58): 52.149,5.951 54.5,8.301 57.899,8.301 60.3,5.9 60.9,5.9 61.2,5.6 61.2,5.4 59,5.4 58,6.4 54.3,6.4 53.6,5.7 53.6,5.45 52.65,5.45
1V8 on Bottom Layer "NONET_L-01_P-001" (solid, pour order 28): 74.8,2.8 76.5,2.8 76.7,3 76.7,3.6 76.6,3.7 74.679,3.7 74.5,3.521 74.5,3 74.6,3
GND on Bottom Layer "NONET_L-01_P-001" (solid, pour order 66): 28,6.7 29.155,6.7 29.6,6.255 29.6,5.4 28.069,5.4 28,5.469
MCU_3V3 on Bottom Layer "NONET_L-01_P-001" (solid, pour order 55): 71.8,8.4 71.8,7.7 71.8,7.601 71.4,7.1 71.2,7.1 71.2,6.4 71.9,5.7 72.5,5.7 72.5,5.5 72.4,5.4 70.7,5.4 70.7,5.8 69.65,6.85 69.15,6.85 69.15,8.15 69.4,8.4
GND on Bottom Layer "NONET_L-01_P-001" (solid, pour order 56): 68.863,8.52 69.275,8.52 69.275,6.955 69.38,6.85 69.65,6.85 70.133,6.367 70,6.235 70,5.9 69.7,5.9 69.6,5.9 68.893,5.9 68.473,6.026
GND on Bottom Layer "NONET_L-01_P-001" (solid, pour order 65): 4,7 4,6.1 6.4,6.1 6.4,7
GND on Bottom Layer "NONET_L-01_P-001" (solid, pour order 62): 50.8,-1.3 51,-1.5 51,-1.9 50.7,-2.2 47.6,-2.2 47.3,-1.9 47.3,-1.4 47.6,-1.4 47.7,-1.3
GND on Bottom Layer "NONET_L-01_P-001" (solid, pour order 60): 60.05,-3.45 60.542,-2.958 60.542,-2.258 61.2,-1.6 62.4,-1.6 63.2,-2.4 63.977,-2.4 64.407,-2.829 64.407,-4.988 60.991,-4.988 60.991,-4.391
GND on Bottom Layer "NONET_L-01_P-001" (solid, pour order 59): 54.7,-1.6 54.7,-2.9 55.3,-3.5 60,-3.5 60.542,-2.958 60.542,-2.242 60.4,-2.1 58,-2.1 57.2,-1.3 55,-1.3
GND on Bottom Layer "NONET_L-01_P-001" (solid, pour order 57): 54.3,6.4 58,6.4 59,5.4 61.5,5.4 62.2,4.7 62.2,4.3 61.1,4.3 60.8,4.6 60.8,4.8 54,4.8 53.6,5.2 53.6,5.7
GND on Bottom Layer "NONET_L-01_P-001" (solid, pour order 54): 71.9,7.3 71.4,7 71.4,6.5 72,5.9 73.3,5.9 73.6,6.2 73.6,7.1 72.3,7.1
MCU_VDDA on Bottom Layer "NONET_L-01_P-001" (solid, pour order 53): 73.5,-0.7 73.5,-1.4 73.8,-1.7 75.3,-1.7 75.3,-1.6 75.5,-1.4 75.5,-0.7 75.4,-0.6 73.6,-0.6
GND on Bottom Layer "NONET_L-01_P-001" (solid, pour order 50): 68.8,-2.9 69.3,-2.9 69.3,-4.6 69.8,-5.1 69.9,-5.1 69.9,-5.3 69.6,-5.6 68.8,-5.6
GND on Bottom Layer "NONET_L-01_P-001" (solid, pour order 48): 73.6,-2 75.4,-2 76.1,-2.7 76.1,-3.7 75,-4.8 73.4,-4.8 73.1,-4.5 73.2,-4.4 73.2,-2.3 73.3,-2.3
1V8 on Bottom Layer "NONET_L-01_P-001" (solid, pour order 29): 81.592,4.08 81.9,3.771 81.9,3.2 81.4,2.7 80,2.7 80,3 79.9,3.1 80.4,3.1 80.6,3.3 80.6,3.894 80.785,4.08
1V8 on Bottom Layer "NONET_L-01_P-001" (solid, pour order 27): 74.6,1.6 74.7,1.7 78.2,1.7 78.4,1.5 78.4,0.5 78.3,0.4 75.875,0.596 75.2,1 74.7,1 74.6,1.199 74.6,1.3
1V8 on Bottom Layer "NONET_L-01_P-001" (solid, pour order 26): 80.1,1.6 81.6,1.6 81.7,1.5 81.7,0.4 81.4,0.1 81.4,-0.2 78.9,-2.7 76.4,-2.7 76,-2.3 76,-0.8 77.7,-0.8
BATT on Bottom Layer "NONET_L-01_P-001" (solid, pour order 20): 4.568,5.2 7.8,5.2 7.8,3.458 4.568,3.458
GND on Layer 2 "NONET_L-01_P-001" (solid, pour order 37): -0.3,-1.3 12.8,-1.3 18.1,-6.6 78.1,-6.6 84.5,-0.2 84.4,-0.1 84.4,8.4 83.4,8.4 80.7,11.1 -0.3,11.1

## Silkscreen, mask and mechanical layers (free items; w line width, h text height)
Top Overlay:
  text "User" at 18.35,7.85 h0.8
  text "Probe" at 1.35,7.15 h0.8
  text "+" at 5.406,5.445 h1.09
  text "Off" at 35.831,5.303 h0.8
  text "On" at 45.437,5.016 h0.8
  text "-" at 4.45,4.05 h0.8
  text "Reset" at 66.45,3.55 h0.8 r90
  text "Batt" at 2.239,0.103 h0.8
  text "Debug STLink" at 8.15,0.017 h0.8
  text "Boot" at 66.35,-2.25 h0.8 r90
  text "Usart" at 61.35,-3.25 h0.8
  text "RX" at 59.85,-4.55 h0.8
  text "TX" at 67.15,-5.25 h0.8
Bottom Overlay:
  drawing of 189 lines, arcs and shapes, not listed
  text "SDA" at 19.15,8.15 h0.8
  text "SCL" at 21.75,8.15 h0.8
  text "y" at 75.65,7.717 h0.8
  text "z" at 75.65,5.75 h0.8
  text "x" at 77.35,5.35 h0.8
  text "IMU" at 78.05,4.05 h0.8
  text "MOSI" at 40.15,3.85 h0.8
  text "NAND Flash" at 49.05,3.55 h0.8
  text "Made with" at 14.15,2.85 h0.8
  text "SCK" at 40.15,2.75 h0.8
  text "MISO" at 55.65,2.45 h0.8
  text "3V3" at 19.05,1.55 h0.8
  text "by AS and IC" at 14.15,1.117 h0.8
  text "1V8" at 81.05,-0.85 h0.8
Board Shape:
  drawing of 3830 lines, arcs and shapes, not listed
Battery outline 80mAh (Mech14):
  lines w0.254: 1.9,0.5 41.9,0.5 41.9,10.5 1.9,10.5 1.9,0.5

## Text inside footprints (layer, text, board x,y; h text height)
SW2: Top Assembly "*" at 73.142,-2.359 h0.8 r180
SW3: Top Assembly "*" at 18.841,1.058 h0.8 r90
SW4: Top Assembly "*" at 67.858,6.859 h0.8
U4: Top Assembly "PCB EDGE" at 56.109,10.354 h0.8 r357